# Altium PCB History-of-my-proto.pcbdoc
Units mil, origin at the board's own origin, x right, y up, seen from the top; angles counter-clockwise.
Board outline 14211.29 x 6437.81 mil, 2 copper layers (Top Layer, Bottom Layer); 75 components, 36 nets, 555 pads, 63 vias.
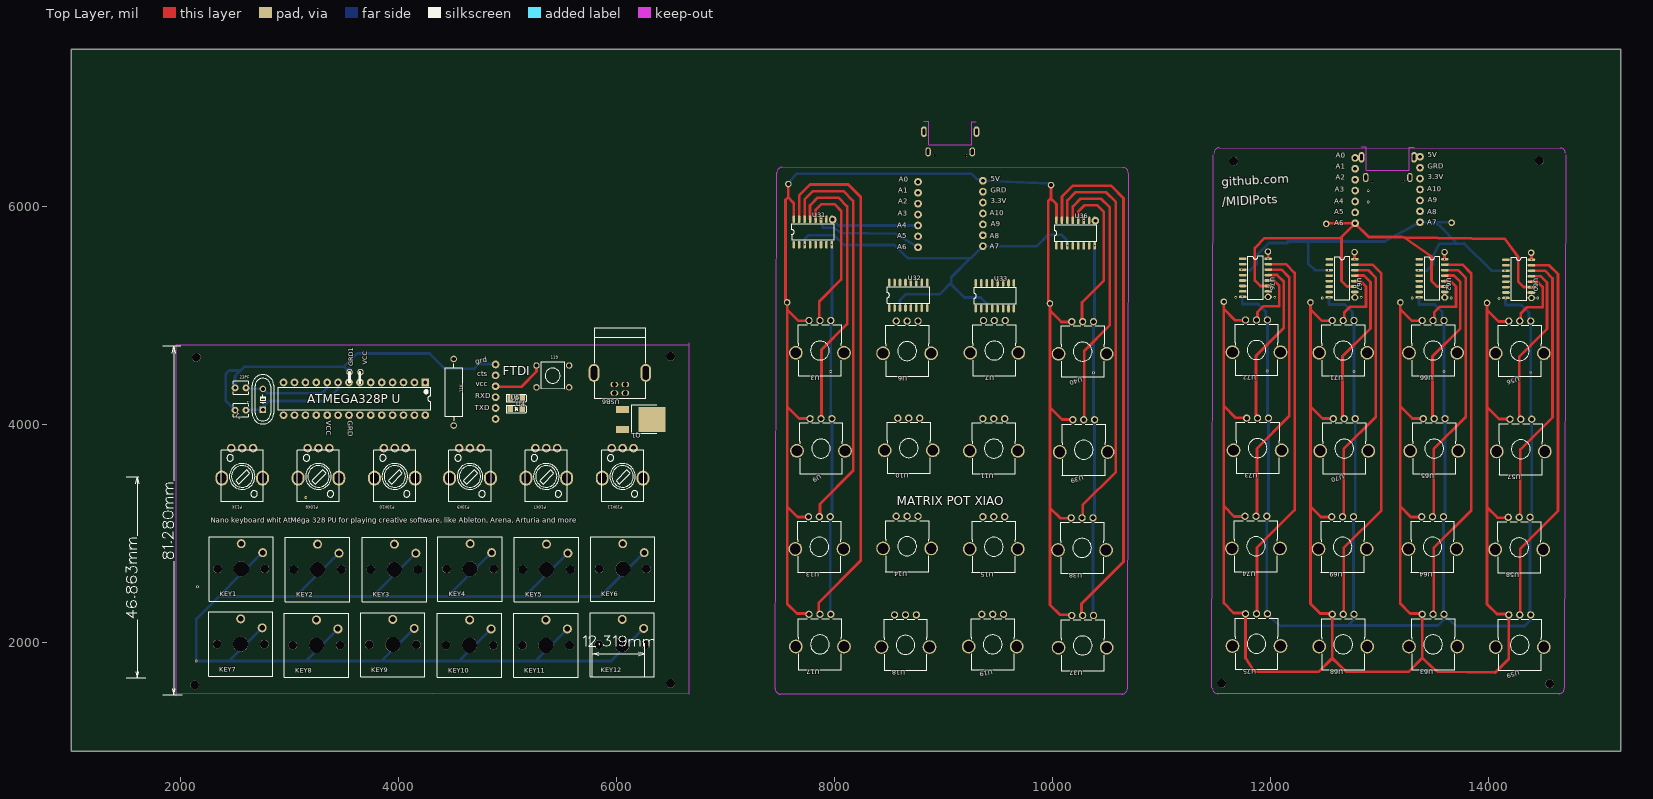
[diagram p0: Top Layer view]
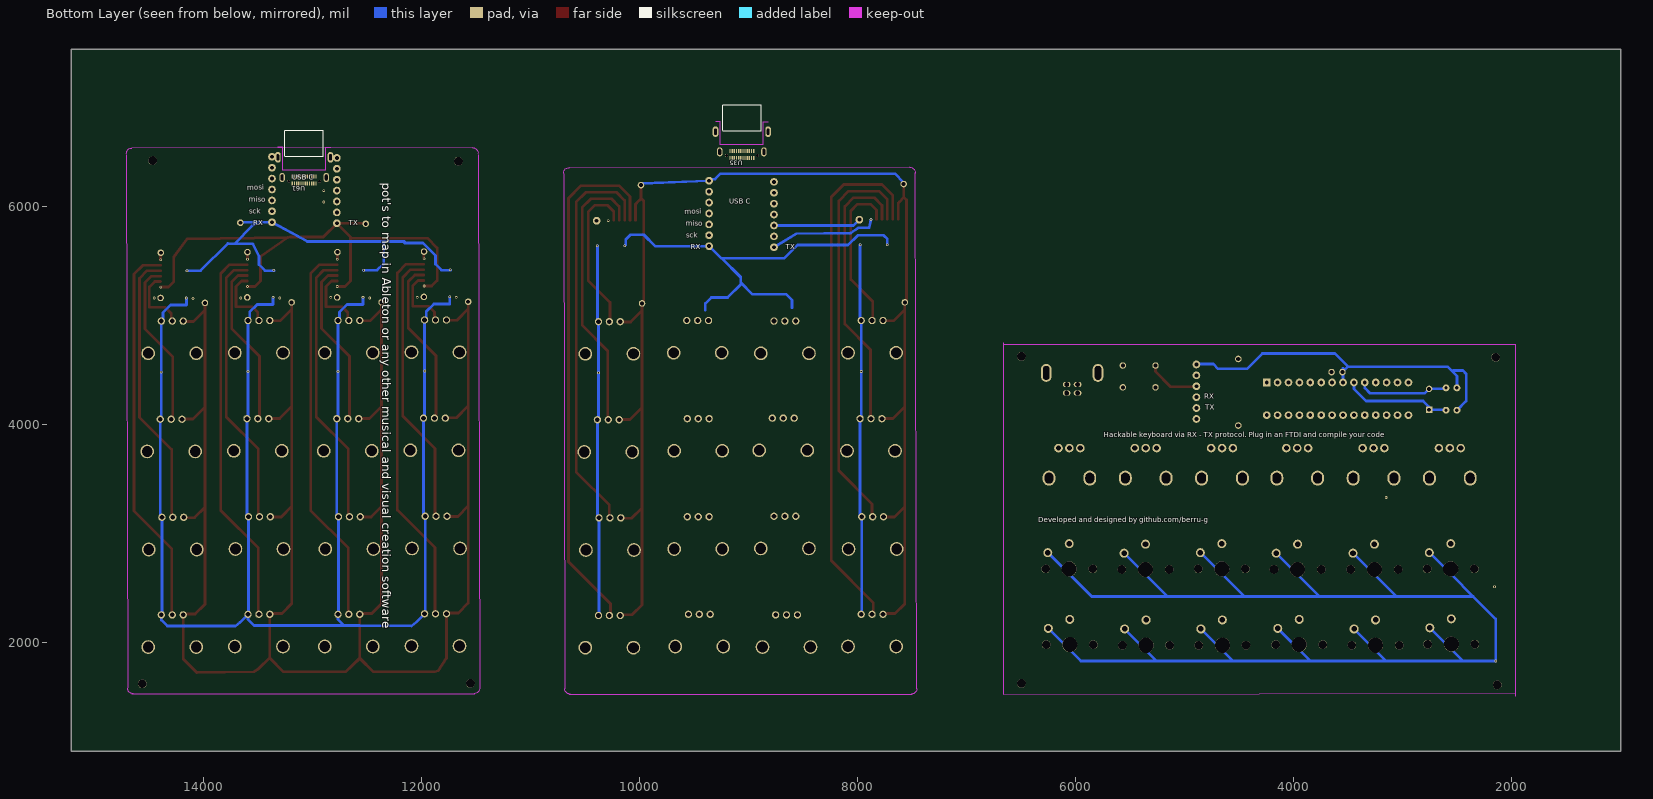
[diagram p1: Bottom Layer view, seen from below]

## Layer stack, top to bottom
Top Layer: signal copper (thickness not stored)
Dielectric: dielectric 12.6, FR-4, Dk 4.8
Bottom Layer: signal copper (thickness not stored)

## Board outline
15211.29,1000 1000,1000 1000,7437.81 15211.29,7437.81

## Components (designator, comment, footprint, x,y, rotation, side; value= is the part's Value field where it differs from the comment)
11K "RES-TH_BD4.0-L11.5-P15.50-D0.7" RES-TH_BD4.0-L11.5-P15.50-D0.7 4506.29,4292.81 r270 top
23PF "CAP-TH_L3.5-W3.0-P2.54-D0.8" CAP-TH_L3.5-W3.0-P2.54-D0.8 2551.29,4332.81 r0 top
119 "SWITCH MINI BUTON PULSER" "SWITCH MINI BUTON PULSER" 5426.29,4427.81 r0 top
"\"1" "CAP-TH_L3.5-W3.0-P2.54-D0.8" CAP-TH_L3.5-W3.0-P2.54-D0.8 2551.29,4127.81 r180 top
.1 "HC-49US_L11.5-W4.5-P4.88" HC-49US_L11.5-W4.5-P4.88 2756.29,4227.81 r90 top
GRD1 "ATMEGA_328PU" ATMEGA_328PU 2946.29,4082.82 r0 top
KEY1 "KEY-TH_CPG135001D0X" KEY-TH_CPG135001D0X 2656.29,2862.82 r0 top
KEY2 "KEY-TH_CPG135001D0X" KEY-TH_CPG135001D0X 3356.29,2857.82 r0 top
KEY3 "KEY-TH_CPG135001D0X" KEY-TH_CPG135001D0X 4061.29,2857.82 r0 top
KEY4 "KEY-TH_CPG135001D0X" KEY-TH_CPG135001D0X 4756.29,2862.82 r0 top
KEY5 "KEY-TH_CPG135001D0X" KEY-TH_CPG135001D0X 5456.29,2857.82 r0 top
KEY6 "KEY-TH_CPG135001D0X" KEY-TH_CPG135001D0X 6156.29,2862.82 r0 top
KEY7 "KEY-TH_CPG135001D0X" KEY-TH_CPG135001D0X 2651.29,2172.82 r0 top
KEY8 "KEY-TH_CPG135001D0X" KEY-TH_CPG135001D0X 3346.29,2162.82 r0 top
KEY9 "KEY-TH_CPG135001D0X" KEY-TH_CPG135001D0X 4046.29,2167.82 r0 top
KEY10 "KEY-TH_CPG135001D0X" KEY-TH_CPG135001D0X 4751.29,2162.82 r0 top
KEY11 "KEY-TH_CPG135001D0X" KEY-TH_CPG135001D0X 5451.29,2162.82 r0 top
KEY12 "KEY-TH_CPG135001D0X" KEY-TH_CPG135001D0X 6151.29,2167.82 r0 top
P10K7 "R09-5KΩ" R09-5KΩ 5356.29,3642.82 r180 top
P10K8 "R09-5KΩ" R09-5KΩ 3266.29,3642.82 r180 top
P10K9 "R09-5KΩ" R09-5KΩ 4656.29,3642.82 r180 top
P10K10 "R09-5KΩ" R09-5KΩ 3966.29,3642.82 r180 top
P10K11 "R09-5KΩ" R09-5KΩ 6056.29,3642.82 r180 top
P11K "R09-5KΩ" R09-5KΩ 2566.29,3642.82 r180 top
Q1 "TO-252-2_L6.6-W6.1-P4.57-LS9.9-BR-CW" TO-252-2_L6.6-W6.1-P4.57-LS9.9-BR-CW 6191.29,4042.82 r180 top
U3 "RES-ADJ-TH_POT-R09V-100K" RES-ADJ-TH_POT-R09V-100K 7866.29,4802.81 r180 top
U4 "LED-3014-FD" LED-3014-FD 5081.29,4137.81 r0 top
U5 "LED-3014-FD" LED-3014-FD 5081.29,4237.81 r0 top
U6 "RES-ADJ-TH_POT-R09V-100K" RES-ADJ-TH_POT-R09V-100K 8666.29,4797.81 r180 top
U7 "RES-ADJ-TH_POT-R09V-100K" RES-ADJ-TH_POT-R09V-100K 9466.29,4802.81 r180 top
U9 "RES-ADJ-TH_POT-R09V-100K" RES-ADJ-TH_POT-R09V-100K 7876.29,3902.82 r180 top
U10 "RES-ADJ-TH_POT-R09V-100K" RES-ADJ-TH_POT-R09V-100K 8681.29,3907.82 r180 top
U11 "RES-ADJ-TH_POT-R09V-100K" RES-ADJ-TH_POT-R09V-100K 9461.29,3902.82 r180 top
U13 "RES-ADJ-TH_POT-R09V-100K" RES-ADJ-TH_POT-R09V-100K 7861.29,3002.82 r180 top
U14 "RES-ADJ-TH_POT-R09V-100K" RES-ADJ-TH_POT-R09V-100K 8666.29,3007.82 r180 top
U15 "RES-ADJ-TH_POT-R09V-100K" RES-ADJ-TH_POT-R09V-100K 9461.29,3002.82 r180 top
U17 "RES-ADJ-TH_POT-R09V-100K" RES-ADJ-TH_POT-R09V-100K 7866.29,2107.82 r180 top
U18 "RES-ADJ-TH_POT-R09V-100K" RES-ADJ-TH_POT-R09V-100K 8651.29,2102.82 r180 top
U19 "RES-ADJ-TH_POT-R09V-100K" RES-ADJ-TH_POT-R09V-100K 9451.29,2107.82 r180 top
U31 "SOIC-16_L9.9-W3.9-P1.27-LS6.0-BL-1" SOIC-16_L9.9-W3.9-P1.27-LS6.0-BL-1 7801.29,5762.81 r0 top
U32 "SOIC-16_L9.9-W3.9-P1.27-LS6.0-BL-1" SOIC-16_L9.9-W3.9-P1.27-LS6.0-BL-1 8676.29,5182.81 r0 top
U33 "SOIC-16_L9.9-W3.9-P1.27-LS6.0-BL-1" SOIC-16_L9.9-W3.9-P1.27-LS6.0-BL-1 9471.29,5177.81 r0 top
U35 "USB-C-SMD_GT-USB-7068B-A" USB-C-SMD_GT-USB-7068B-A 9061.29,6562.81 r180 bottom
U36 "SOIC-16_L9.9-W3.9-P1.27-LS6.0-BL-1" SOIC-16_L9.9-W3.9-P1.27-LS6.0-BL-1 10211.29,5752.81 r0 top
U37 "RES-ADJ-TH_POT-R09V-100K" RES-ADJ-TH_POT-R09V-100K 10276.29,2097.82 r180 top
U38 "RES-ADJ-TH_POT-R09V-100K" RES-ADJ-TH_POT-R09V-100K 10271.29,2992.82 r180 top
U39 "RES-ADJ-TH_POT-R09V-100K" RES-ADJ-TH_POT-R09V-100K 10286.29,3892.82 r180 top
U40 "RES-ADJ-TH_POT-R09V-100K" RES-ADJ-TH_POT-R09V-100K 10276.29,4792.81 r180 top
U56 "RES-ADJ-TH_POT-R09V-100K" RES-ADJ-TH_POT-R09V-100K 14286.29,4797.81 r180 top
U57 "RES-ADJ-TH_POT-R09V-100K" RES-ADJ-TH_POT-R09V-100K 14296.29,3897.82 r180 top
U58 "RES-ADJ-TH_POT-R09V-100K" RES-ADJ-TH_POT-R09V-100K 14281.29,2997.82 r180 top
U59 "RES-ADJ-TH_POT-R09V-100K" RES-ADJ-TH_POT-R09V-100K 14286.29,2102.82 r180 top
U60 "SOIC-16_L9.9-W3.9-P1.27-LS6.0-BL-1" SOIC-16_L9.9-W3.9-P1.27-LS6.0-BL-1 14276.29,5332.81 r270 top
U61 "USB-C-SMD_GT-USB-7068B-A" USB-C-SMD_GT-USB-7068B-A 13076.29,6327.81 r180 bottom
U62 "SOIC-16_L9.9-W3.9-P1.27-LS6.0-BL-1" SOIC-16_L9.9-W3.9-P1.27-LS6.0-BL-1 13481.29,5337.81 r270 top
U63 "RES-ADJ-TH_POT-R09V-100K" RES-ADJ-TH_POT-R09V-100K 13491.29,2107.82 r180 top
U64 "RES-ADJ-TH_POT-R09V-100K" RES-ADJ-TH_POT-R09V-100K 13486.29,3002.82 r180 top
U65 "RES-ADJ-TH_POT-R09V-100K" RES-ADJ-TH_POT-R09V-100K 13501.29,3902.82 r180 top
U66 "RES-ADJ-TH_POT-R09V-100K" RES-ADJ-TH_POT-R09V-100K 13491.29,4802.81 r180 top
U67 "SOIC-16_L9.9-W3.9-P1.27-LS6.0-BL-1" SOIC-16_L9.9-W3.9-P1.27-LS6.0-BL-1 12656.29,5337.81 r270 top
U68 "RES-ADJ-TH_POT-R09V-100K" RES-ADJ-TH_POT-R09V-100K 12666.29,2107.82 r180 top
U69 "RES-ADJ-TH_POT-R09V-100K" RES-ADJ-TH_POT-R09V-100K 12661.29,3002.82 r180 top
U70 "RES-ADJ-TH_POT-R09V-100K" RES-ADJ-TH_POT-R09V-100K 12676.29,3902.82 r180 top
U71 "RES-ADJ-TH_POT-R09V-100K" RES-ADJ-TH_POT-R09V-100K 12666.29,4802.81 r180 top
U72 "RES-ADJ-TH_POT-R09V-100K" RES-ADJ-TH_POT-R09V-100K 11871.29,4807.81 r180 top
U73 "RES-ADJ-TH_POT-R09V-100K" RES-ADJ-TH_POT-R09V-100K 11881.29,3907.82 r180 top
U74 "RES-ADJ-TH_POT-R09V-100K" RES-ADJ-TH_POT-R09V-100K 11866.29,3007.82 r180 top
U75 "RES-ADJ-TH_POT-R09V-100K" RES-ADJ-TH_POT-R09V-100K 11871.29,2112.82 r180 top
U76 "SOIC-16_L9.9-W3.9-P1.27-LS6.0-BL-1" SOIC-16_L9.9-W3.9-P1.27-LS6.0-BL-1 11861.29,5342.81 r270 top
USB6 "USB-B-TH_FUS213-FDBXXK" USB-B-TH_FUS213-FDBXXK 6031.29,4377.81 r180 top
? "" ? 1926.99,3112.82 r0 top
? "" ? 1591.64,2590.32 r0 top
? "" ? 6018.79,1867.77 r0 top
? "" ? 5416.29,4167.81 r0 top
? "" ? 5740.81,4438.33 r0 top

## Footprints (in the part's own frame and the unit in brackets; to place one, negate y for a bottom-side part, rotate by r counter-clockwise, add the part's x,y. Pads: shape width x height; smd on the part's side, far side on the other; paste and mask are expansions set on the pad)
ATMEGA_328PU [mm]
  rect 1.8x1.8 hole 0.9: 1(33.02,7.62)
  round 1.8 hole 0.9: 2(30.48,7.62) 3(27.94,7.62) 4(25.4,7.62) 5(22.86,7.62) 6(20.32,7.62) 7(17.78,7.62) 8(15.24,7.62) 9(12.7,7.62) 10(10.16,7.62) 11(7.62,7.62) 12(5.08,7.62) 13(2.54,7.62) 14(0,7.62) 15(0,0) 16(2.54,0) 17(5.08,0) 18(7.62,0) 19(10.16,0) 20(12.7,0) 21(15.24,0) 22(17.78,0) 23(20.32,0) 24(22.86,0) 25(25.4,0) 26(27.94,0) 27(30.48,0) 28(33.02,0)
  silkscreen extent -1.19,1.16 34.21,6.46
CAP-TH_L3.5-W3.0-P2.54-D0.8 [mm]
  round 1.6 hole 0.8: 1(-1.27,0) 2(1.27,0)
  silkscreen extent -1.75,-1.5 1.75,1.5
HC-49US_L11.5-W4.5-P4.88 [mm]
  rect 1.5x1.5 hole 0.9: 1(-2.438,0)
  round 1.5 hole 0.9: 2(2.438,0)
  silkscreen extent -5.74,-2.5 5.74,2.5
KEY-TH_CPG135001D0X [mm]
  round 2.1 hole 1.3: 1(-2.5,1.05) 2(2.5,-1.05)
  round 2 hole 2 unplated: ""(-8,-4.85) ""(3,-4.85)
  round 3.5 hole 3.5 unplated: ""(-2.5,-4.85)
  silkscreen extent -10,-12.35 5,2.65
LED-3014-FD [mm]
  rect 1.3x1.4 smd: 1(-1.4,0) 2(1.4,0)
  silkscreen extent -2.26,-0.96 2.34,0.94
R09-5KΩ [mm]
  round 2 hole 1.2: 1(-2.54,-3.5) 2(0,-3.5) 3(2.54,-3.5)
  oval 3x3.5 hole 2 slot 2.5 at 90 deg: 4(4.75,3.5) 5(-4.75,3.5)
  silkscreen extent -4.9,-3 4.9,9
RES-ADJ-TH_POT-R09V-100K [mm]
  round 1.7 hole 1.1: 1(-2.54,-3.75) 2(0,-3.75) 3(2.54,-3.75)
  round 3.2 hole 2.5: 4(5.6,3.75) 5(-5.6,3.75)
  silkscreen extent -5,-2.75 5,9.25
RES-TH_BD4.0-L11.5-P15.50-D0.7 [mil]
  round 60 hole 39.37: 1(-305.12,0) 2(305.11,0)
  silkscreen extent -260,-79 260,79
SOIC-16_L9.9-W3.9-P1.27-LS6.0-BL-1 [mm]
  oval 0.6x1.8 smd: 1(-4.445,-2.972) 2(-3.175,-2.972) 3(-1.905,-2.972) 4(-0.635,-2.972) 5(0.635,-2.972) 6(1.905,-2.972) 7(3.175,-2.972) 8(4.445,-2.972) 9(4.445,2.972) 10(3.175,2.972) 11(1.905,2.972) 12(0.635,2.972) 13(-0.635,2.972) 14(-1.905,2.972) 15(-3.175,2.972) 16(-4.445,2.972)
  silkscreen extent -4.98,-1.85 4.98,1.83
"SWITCH MINI BUTON PULSER" [mil]
TO-252-2_L6.6-W6.1-P4.57-LS9.9-BR-CW [mm]
  rect 3x1.6 smd: 1(3.424,-2.29) 3(3.424,2.29)
  rect 6.2x5.8 smd: 2(-3.424,0)
  silkscreen extent -4.58,-3.35 1.38,3.35
USB-B-TH_FUS213-FDBXXK [mm]
  oval 1.8x1.2 hole 1: 1(1.27,2.355) 2(-1.27,2.355) 3(-1.27,0.355) 4(1.27,0.355)
  oval 2.5x4.2 hole 1.5 slot 3.2 at 90 deg: 5(-6.025,-2.355) 5(6.025,-2.355)
  silkscreen extent -6,-12.75 6,3.55
USB-C-SMD_GT-USB-7068B-A [mm]
  oval 1.3x2.5 hole 0.6 slot 1.4 at 90 deg: 25(-6.13,3.05) 25(6.13,3.05)
  oval 1.3x2.1 hole 0.6 slot 1.4 at 90 deg: 25(-5.15,-1.65) 25(5.15,-1.65)
  rect 0.3x0.95 smd: A1(2.75,-3.05) A2(2.25,-3.05) A3(1.75,-3.05) A4(1.25,-3.05) A5(0.75,-3.05) A6(0.25,-3.05) A7(-0.25,-3.05) A8(-0.75,-3.05) A9(-1.25,-3.05) A10(-1.75,-3.05) A11(-2.25,-3.05) A12(-2.75,-3.05) B1(-2.75,-1.45) B2(-2.25,-1.45) B3(-1.75,-1.45) B4(-1.25,-1.45) B5(-0.75,-1.45) B6(-0.25,-1.45) B7(0.25,-1.45) B8(0.75,-1.45) B9(1.25,-1.45) B10(1.75,-1.45) B11(2.25,-1.45) B12(2.75,-1.45)
  round 0.65 hole 0.65 unplated: ""(-3.6,-2.5) ""(3.6,-2.5)
  Keep-Out Layer lines w0.254: 6.15,5.35 5,5.35 5,0 -5,0 -5,5.35 -6.12,5.35
  silkscreen extent -4.47,3.25 4.47,9.25
? [mil]
  silkscreen extent -89,-1600 89,1600

## Free pads (board coordinates)
  round 60 hole 36: 2(3651.29,4477.81) 3(3551.29,4477.81) 29(7576.29,6202.81) 29(9986.29,6192.81) 29(11976.29,5582.81) 29(12771.29,5577.81) 29(13596.29,5577.81) 29(14391.29,5572.81) 30(7566.29,5117.81) 30(9976.29,5107.81) 30(11571.29,5122.81) 30(12366.29,5117.81) 30(13191.29,5117.81) 30(13986.29,5112.81) 32(11978.29,5167.81) 32(12773.29,5162.81) 32(13598.29,5162.81) 32(14393.29,5157.81) 33(12511.29,5837.81) 34(13661.29,5847.81)
  round 70.87 hole 35.43: 3V(9361.29,6032.81) 3V(13371.29,6252.81) 5V(9361.29,6232.81) 5V(13371.29,6452.81) 23(4891.29,4047.82) 23(8766.29,5622.81) 23(8766.29,5722.81) 23(12776.29,5842.81) 23(12776.29,5942.81) 24(4891.29,4147.81) 24(8766.29,5822.81) 24(12776.29,6042.81) 25(4891.29,4247.81) 26(4891.29,4347.81) 27(4891.29,4447.81) 28(4891.29,4547.81) 31(7983.07,5876.03) 31(10393.07,5866.03) A0(8766.29,6222.81) A0(12776.29,6442.81) A1(8766.29,6122.81) A1(12776.29,6342.81) A2(8766.29,6022.81) A2(12776.29,6242.81) A3(8766.29,5922.81) A3(12776.29,6142.81) A7(9361.29,5632.81) A7(13371.29,5852.81) A8(9361.29,5732.81) A8(13371.29,5952.81) A9(9361.29,5832.81) A9(13371.29,6052.81) A10(9361.29,5932.81) A10(13371.29,6152.81) GRD(9361.29,6132.81) GRD(13371.29,6352.81)
  round 59.05 hole 35.98: A1(5266.29,4337.81) A2(5566.29,4337.81) B1(5266.29,4537.81) B2(5566.29,4537.81)
  round 80 hole 80 unplated: ""(2131.29,1607.82) ""(2146.29,4612.81) ""(6496.29,1622.82) ""(6496.29,4622.81) ""(11551.29,1622.82) ""(11661.29,6412.81) ""(14466.29,6417.81) ""(14561.29,1617.82)

## Via types
v1: diameter 24, hole 12, Top Layer to Bottom Layer, tented both sides, 63 vias

## Nets (pads, with @x,y where several pads share a name; then routed paths per layer and width w, separated by ;. In a path a pad name is that pad's centre, name@x,y a point inside that pad or via, vN(x,y) a via of type N, cw(c..) or ccw(c..) an arc to the next point about the centre after c; other vN are vias at no path point)
3.3V: pad.3V
5V: 11K.1 11K.2 23PF.1 23PF.2 "\"1.1" "\"1.2" .1.1 .1.2 GRD1.1 GRD1.3 GRD1.7 GRD1.8 GRD1.9 GRD1.10 GRD1.15 GRD1.21 GRD1.22 GRD1.26 KEY1.2 KEY2.2 KEY3.2 KEY4.2 KEY5.2 KEY6.2 KEY7.2 KEY8.2 KEY9.2 KEY10.2 KEY11.2 KEY12.2 P10K7.1 P10K7.3 P10K8.1 P10K8.3 P10K9.1 P10K9.3 P10K10.1 P10K10.3 P10K11.1 P10K11.3 P11K.1 P11K.3 pad.2 pad.3 pad.5V pad.23@4891.29,4047.82 pad.26 pad.28 pad.29 pad.30 pad.B1 U3.3 U9.3 U13.3 U17.3 U31.16 U36.16 U37.3 U38.3 U39.3 U40.3 U56.3 U57.3 U58.3 U59.3 U60.16 U62.16 U63.3 U64.3 U65.3 U66.3 U67.16 U68.3 U69.3 U70.3 U71.3 U72.3 U73.3 U74.3 U75.3 U76.16 USB6.1 USB6.4 | length 61117.3
  Top Layer w25: pad.26 4896.29,4342.81 5126.29,4342.81 5266.29,4482.81 pad.B1 ; 7566.29,4181.7 7566.29,3242.82 ; U31.16 7626.29,6027.81 7616.29,6037.81 7576.29,6077.81 v1(7576.29,6202.81) 7576.29,6082.81 7551.29,6057.81 7551.29,5132.81 pad.30@7566.29,5117.81 ; U13.3 7758.65,3147.82 7661.29,3147.82 7566.29,3242.82 ; U17.3 7758.93,2262.82 7656.29,2262.82 7566.29,2352.82 7566.29,3242.82 ; U3.3 7763.65,4947.81 7671.29,4947.81 7566.29,5052.81 pad.30@7566.29,5117.81 ; U9.3 7773.93,4052.82 7676.29,4052.82 7566.29,4162.81 pad.30@7566.29,5117.81 ; 8766.29,6022.81 8771.29,6017.81 ; 9361.29,6032.81 9366.29,6027.81 ; 9976.29,4171.7 9976.29,3232.82 ; U36.16 10036.29,6017.81 10026.29,6027.81 9986.29,6067.81 v1(9986.29,6192.81) 9986.29,6072.81 9961.29,6047.81 9961.29,5122.81 pad.30@9976.29,5107.81 ; U38.3 10168.65,3137.82 10071.29,3137.82 9976.29,3232.82 ; U37.3 10168.93,2252.82 10066.29,2252.82 9976.29,2342.82 9976.29,3232.82 ; U40.3 10173.65,4937.81 10081.29,4937.81 9976.29,5042.81 pad.30@9976.29,5107.81 ; U39.3 10183.93,4042.82 10086.29,4042.82 9976.29,4152.81 pad.30@9976.29,5107.81 ; 11571.29,4186.7 11571.29,3247.82 ; U74.3 11763.65,3152.82 11666.29,3152.82 11571.29,3247.82 ; 11771.29,1852.82 11846.29,1737.82 11881.29,1727.82 12441.29,1727.82 12566.29,1852.82 ; 11771.29,1857.82 U75.3 11763.93,2267.82 11661.29,2267.82 11571.29,2357.82 11571.29,3247.82 ; U72.3 11768.65,4952.81 11676.29,4952.81 11571.29,5057.81 11571.29,5122.81 11571.29,4167.81 11681.29,4057.82 11778.93,4057.82 U73.3 ; v1(11976.29,5582.81) 11978.29,5580.81 U76.16 ; 12366.29,4181.7 12366.29,3242.82 ; U69.3 12558.65,3147.82 12461.29,3147.82 12366.29,3242.82 ; U71.3 12563.65,4947.81 12471.29,4947.81 12366.29,5052.81 12366.29,5117.81 12366.29,4162.81 12476.29,4052.82 12573.93,4052.82 U70.3 ; v1(12771.29,5512.81) pad.29@12771.29,5577.81 ; 12776.29,6242.81 12781.29,6237.81 ; 13191.29,4181.7 13191.29,3242.82 ; 13371.29,6252.81 13376.29,6247.81 ; U64.3 13383.65,3147.82 13286.29,3147.82 13191.29,3242.82 ; 13391.29,1861.45 13501.29,1751.45 13536.29,1727.82 14061.29,1722.82 14186.29,1847.82 U59.3 14178.93,2257.82 14076.29,2257.82 13986.29,2347.82 13986.29,3237.82 ; U63.3@13391.29,2255.41 13391.29,1852.82 13266.29,1727.82 12696.29,1727.82 12566.29,1852.82 ; U63.3 13383.93,2262.82 13281.29,2262.82 13191.29,2352.82 13191.29,3242.82 ; U66.3 13388.65,4947.81 13296.29,4947.81 13191.29,5052.81 13191.29,5117.81 13191.29,4162.81 13301.29,4052.82 13398.93,4052.82 U65.3 ; v1(13596.29,5512.81) pad.29@13596.29,5577.81 ; 13986.29,4176.7 13986.29,3237.82 ; U58.3 14178.65,3142.82 14081.29,3142.82 13986.29,3237.82 ; U56.3 14183.65,4942.81 14091.29,4942.81 13986.29,5047.81 13986.29,5112.81 13986.29,4157.81 14096.29,4047.82 14193.93,4047.82 U57.3 ; v1(14391.29,5572.81) 14393.29,5570.81 U60.16 ; 12366.29,3242.82 12366.29,2352.82 12456.29,2262.82 12558.93,2262.82 U68.3 12566.29,1852.82
  Bottom Layer w24: GRD1.8 3546.29,4512.81 ; pad.3@3546.29,4457.81 3551.29,4462.81 v1(3551.29,4477.81)
  Bottom Layer w25: 2351.41,2418.18 3056.41,2418.18 ; 2501.28,4127.81 2416.29,4212.81 2416.29,4462.81 2446.29,4492.81 2536.57,4492.81 ; 23PF.1 2501.28,4442.81 2586.29,4527.81 3501.29,4527.81 ; 2601.28,4127.81 2605.28,4131.81 .1.1 2756.28,4157.81 2811.29,4212.81 3336.29,4212.81 3446.29,4322.81 GRD1.9 ; 23PF.2 2610.28,4323.82 .1.2 2797.28,4282.81 3296.29,4282.81 3346.29,4332.81 GRD1.10 ; KEY7.2 2446.05,1827.82 v1(2146.29,1827.82) ; KEY1.2 2146.29,2213.06 v1(2146.29,1827.82) ; KEY8.2 3151.05,1827.82 v1(2146.29,1827.82) ; KEY2.2 3056.41,2418.18 ; v1(3551.29,4477.81) 3501.29,4527.81 ; 3749.7,2418.18 4451.41,2418.18 ; KEY9.2 3846.05,1827.82 v1(2146.29,1827.82) ; KEY3.2 3761.41,2418.18 3056.41,2418.18 ; KEY10.2 4556.05,1827.82 v1(2146.29,1827.82) ; KEY4.2 4451.41,2418.18 ; pad.28 4886.29,4552.81 4736.29,4552.81 4691.29,4507.81 4426.29,4507.81 4286.29,4647.81 3621.29,4647.81 3501.29,4527.81 ; 5139.7,2418.18 5851.41,2418.18 KEY6.2 ; KEY11.2 5256.05,1827.82 v1(2146.29,1827.82) ; KEY5.2 5156.41,2418.18 4451.41,2418.18 ; KEY12.2 5951.05,1827.82 v1(2146.29,1827.82) ; pad.29@7576.29,6217.81 7656.29,6297.81 9256.29,6297.81 9306.29,6247.81 pad.5V@9361.29,6247.81 ; v1(9361.29,6232.81) pad.29@9986.29,6207.81
  other v1: 2156.29,2507.82 3151.29,3327.82 3651.29,4477.81 14391.29,5507.81 11976.29,5517.81 13371.29,6452.81
A: pad.32
A0: pad.A0
A1: pad.A1@8766.29,6122.81 pad.A1@12776.29,6342.81
A2: pad.A2@8766.29,6022.81 pad.A2@12776.29,6242.81
A3: pad.A3
  other v1: 14451.29,5157.81 12831.29,5162.81 8766.29,5922.81 12896.29,6142.81
A4: pad.24@8766.29,5822.81 pad.24@12776.29,6042.81 pad.31 | length 838.6
  Bottom Layer w25: pad.31@7971.29,5887.81 7983.07,5876.03 8036.29,5822.81 v1(8766.29,5822.81) ; pad.31@10381.29,5877.81 pad.31@10393.07,5866.03
  other v1: 13659.29,5157.81 12039.29,5162.81 12896.29,6037.81
A5: pad.23@8766.29,5722.81 pad.23@12776.29,5942.81 U31.10 U36.10 U60.10 U62.10 U67.10 U76.10
AREF: GRD1.20
GRD: 
  other v1: 14156.29,5157.81 12536.29,5162.81 13361.29,5162.81 11741.29,5167.81
MISO: pad.A9
  other v1: 9361.29,5832.81 13371.29,6052.81
MOSI: pad.A10
  other v1: 9361.29,5932.81 13371.29,6152.81
RX: pad.25 pad.34 pad.A7 | length 8136.2
  Bottom Layer w25: v1(7726.29,5645.81) 7726.29,5697.81 7761.29,5732.81 7996.29,5732.81 8086.29,5642.81 8551.29,5642.81 8671.29,5522.81 9251.29,5522.81 ; 8601.29,5067.81 8601.29,5137.81 8656.29,5192.81 8966.29,5192.81 9071.29,5297.81 ; 9396.29,5048.03 9396.29,5107.81 9341.29,5162.81 9191.29,5162.81 9071.29,5282.81 9071.29,5297.81 ; v1(10136.29,5635.81) 10126.29,5645.81 10126.29,5692.81 10081.29,5737.81 9961.29,5737.81 9856.29,5632.81 v1(9361.29,5632.81) 9251.29,5522.81 ; v1@11731.29,5412.81 11816.29,5412.81 11871.29,5467.81 11871.29,5547.81 11986.29,5662.81 12156.29,5662.81 ; 12156.29,5676.34 13049.81,5676.34 v1(13371.29,5852.81) ; 12346.29,5676.34 12346.29,5467.81 12406.29,5412.81 v1(12531.29,5412.81) ; v1@13351.29,5407.81 13436.29,5407.81 13491.29,5462.81 13491.29,5542.81 13546.29,5652.81 13776.29,5657.81 14026.29,5407.81 v1(14151.29,5407.81) ; pad.34 13656.29,5852.81 v1(13371.29,5852.81) ; 13710.18,5657.81 13556.29,5817.81 13491.29,5852.81 v1(13371.29,5852.81) ; 9071.29,5297.81 9071.29,5347.81 9246.29,5522.81 9251.29,5522.81
  other v1: 4891.29,4247.81 4146.29,4382.81 13356.29,5412.81 11736.29,5417.81
S$1229: GRD1.4 GRD1.5 KEY1.1 KEY7.1 KEY8.1 pad.A2@5566.29,4337.81
S$1965: GRD1.6 KEY9.1
S$1968: GRD1.11
S$1970: GRD1.12
S$2162: GRD1.28
S$2168: GRD1.2 GRD1.25
S$2170: GRD1.23 GRD1.24 P10K7.2 P10K8.2 P10K9.2 P10K10.2 P10K11.2 P11K.2
S$2203: GRD1.13
S$2205: GRD1.14
S$2361: GRD1.16
S$2363: GRD1.17
S$2365: GRD1.18
S$27766: 
S$27770: 
S$122089: U3.2 U31.12 U36.12 U40.2 U56.2 U60.12 U62.12 U66.2 U67.12 U71.2 U72.2 U76.12 | length 5347.8
  Top Layer w25: U31.12 7826.29,5962.81 7881.29,6017.81 8001.29,6017.81 8061.29,5957.81 8061.29,5327.81 7861.29,5127.81 7861.29,4955.45 U3.2 ; U36.12 10236.29,5952.81 10291.29,6007.81 10411.29,6007.81 10471.29,5947.81 10471.29,5317.81 10271.29,5117.81 10271.29,4945.45 U40.2 ; U72.2 11881.29,4965.45 11881.29,5027.81 11936.29,5082.81 12081.29,5082.81 12081.29,5267.81 12031.29,5317.81 U76.12 ; U71.2 12676.29,4960.45 12676.29,5022.81 12731.29,5077.81 12876.29,5077.81 12876.29,5262.81 12826.29,5312.81 U67.12 ; U66.2 13501.29,4960.45 13501.29,5022.81 13556.29,5077.81 13701.29,5077.81 13701.29,5262.81 13651.29,5312.81 U62.12 ; U56.2 14296.29,4955.45 14296.29,5017.81 14351.29,5072.81 14496.29,5072.81 14496.29,5257.81 14446.29,5307.81 U60.12
S$122093: U9.2 U31.13 U36.13 U39.2 U57.2 U60.13 U62.13 U65.2 U67.13 U70.2 U73.2 U76.13 | length 11282
  Top Layer w25: U31.13 7776.29,6007.81 7846.29,6077.81 8036.29,6077.81 8116.29,5997.81 8116.29,4917.81 7881.29,4682.81 7881.29,4055.45 U9.2 ; U36.13 10186.29,5997.81 10256.29,6067.81 10446.29,6067.81 10526.29,5987.81 10526.29,4907.81 10291.29,4672.81 10291.29,4045.45 U39.2 ; U73.2 11866.29,4070.45 11866.29,4627.81 12121.29,4882.81 12121.29,5307.81 12061.29,5367.81 U76.13 ; U70.2 12661.29,4065.45 12661.29,4622.81 12916.29,4877.81 12916.29,5302.81 12856.29,5362.81 U67.13 ; U65.2 13486.29,4065.45 13486.29,4622.81 13741.29,4877.81 13741.29,5302.81 13681.29,5362.81 U62.13 ; U57.2 14281.29,4060.45 14281.29,4617.81 14536.29,4872.81 14536.29,5297.81 14476.29,5357.81 U60.13
S$122097: U13.2 U31.14 U36.14 U38.2 U58.2 U60.14 U62.14 U64.2 U67.14 U69.2 U74.2 U76.14 | length 17607
  Top Layer w25: U31.14 7726.29,6062.81 7801.29,6137.81 8081.29,6137.81 8171.29,6047.81 8171.29,3572.82 7866.29,3267.82 7866.29,3155.45 U13.2 ; U36.14 10136.29,6052.81 10211.29,6127.81 10491.29,6127.81 10581.29,6037.81 10581.29,3562.82 10276.29,3257.82 10276.29,3145.45 U38.2 ; U74.2 11876.29,3165.45 11876.29,3777.82 12171.29,4072.82 12171.29,5347.81 12101.29,5417.81 U76.14 ; U69.2 12671.29,3160.45 12671.29,3772.82 12966.29,4067.82 12966.29,5342.81 12896.29,5412.81 U67.14 ; U64.2 13496.29,3160.45 13496.29,3772.82 13791.29,4067.82 13791.29,5342.81 13721.29,5412.81 U62.14 ; U58.2 14291.29,3155.45 14291.29,3767.82 14586.29,4062.82 14586.29,5337.81 14516.29,5407.81 U60.14
S$122104: U17.2 U31.15 U36.15 U37.2 U59.2 U60.15 U62.15 U63.2 U67.15 U68.2 U75.2 U76.15 | length 23919.9
  Top Layer w25: U31.15 7676.29,6097.81 7776.29,6197.81 8126.29,6197.81 8241.29,6082.81 8241.29,2747.82 7856.29,2362.82 7856.29,2265.45 U17.2 ; U36.15 10086.29,6087.81 10186.29,6187.81 10536.29,6187.81 10651.29,6072.81 10651.29,2737.82 10266.29,2352.82 10266.29,2255.45 U37.2 ; U75.2 11876.29,2265.45 11876.29,2867.82 12221.29,3212.82 12221.29,5387.81 12141.29,5467.81 U76.15 ; U68.2 12671.29,2260.45 12671.29,2862.82 13016.29,3207.82 13016.29,5382.81 12936.29,5462.81 U67.15 ; U63.2 13496.29,2260.45 13496.29,2862.82 13841.29,3207.82 13841.29,5382.81 13761.29,5462.81 U62.15 ; U59.2 14291.29,2255.45 14291.29,2857.82 14636.29,3202.82 14636.29,5377.81 14556.29,5457.81 U60.15
S$131267: GRD1.27 pad.27 pad.GRD U3.1 U9.1 U13.1 U17.1 U37.1 U38.1 U39.1 U40.1 U56.1 U57.1 U58.1 U59.1 U63.1 U64.1 U65.1 U66.1 U68.1 U69.1 U70.1 U71.1 U72.1 U73.1 U74.1 U75.1 | length 22127.5
  Bottom Layer w25: U17.1 7961.29,2260.45 U13.1 7976.29,3165.45 U9.1 7966.29,4060.45 v1(7966.29,4482.81) U3.1 7976.29,4960.45 v1(7976.29,5645.81) ; U37.1 10371.29,2250.45 U38.1 10386.29,3155.45 U39.1 10376.29,4050.45 v1(10376.29,4472.81) U40.1 10386.29,4950.45 v1(10386.29,5635.81) ; 11741.29,5167.81 11741.29,5102.81 11886.29,5102.81 11956.29,5032.81 11956.29,4970.45 U72.1 v1(11971.29,4487.81) 11971.29,4065.45 U73.1 11981.29,3170.45 U74.1 11966.29,2265.45 U75.1 12046.29,2185.45 12091.29,2147.82 12711.29,2152.82 12766.29,2207.82 U68.1 12761.29,2260.45 U69.1 12776.29,3165.45 U70.1 12766.29,4060.45 v1(12766.29,4482.81) U71.1 12751.29,4965.45 12751.29,5027.81 12681.29,5097.81 12536.29,5097.81 12536.29,5162.81 ; 12566.29,2152.82 13536.29,2152.82 13591.29,2207.82 U63.1 ; 13361.29,5162.81 13361.29,5097.81 13506.29,5097.81 13576.29,5027.81 13576.29,4965.45 U66.1 v1(13591.29,4482.81) 13591.29,4060.45 U65.1 13601.29,3165.45 U64.1 13586.29,2260.45 U63.1 ; 14156.29,5157.81 14156.29,5092.81 14301.29,5092.81 14371.29,5022.81 14371.29,4960.45 U56.1 v1(14386.29,4477.81) 14386.29,4055.45 U57.1 14396.29,3160.45 U58.1 14381.29,2255.45 U59.1 14386.29,2202.82 14331.29,2147.82 13706.29,2147.82 13666.29,2180.45 U63.1
  other v1: 14096.29,5152.81 12476.29,5157.81 13301.29,5157.81 11681.29,5162.81 9361.29,6132.81 13371.29,6352.81
SCK: pad.A8
TX: pad.23@8766.29,5622.81 pad.23@12776.29,5842.81 pad.24@4891.29,4147.81 pad.33 U31.9 U31.11 U36.9 U36.11 U60.9 U60.11 U62.9 U62.11 U67.9 U67.11 U76.9 U76.11 | length 6064.6
  Top Layer w25: U76.11 11906.29,5267.81 11856.29,5317.81 11856.29,5617.81 11944.81,5706.34 12651.29,5706.34 ; pad.33 12516.29,5842.81 pad.23@12776.29,5842.81 ; U67.11 12701.29,5262.81 12651.29,5312.81 12651.29,5537.81 12651.29,5717.81 pad.23@12776.29,5842.81 ; 13046.29,5717.81 12901.29,5717.81 ; 13206.29,5717.81 12901.29,5717.81 ; U62.11 13526.29,5262.81 13476.29,5312.81 13476.29,5537.81 13226.29,5712.81 14151.29,5697.81 14271.29,5532.81 14271.29,5307.81 14321.29,5257.81 U60.11 ; pad.23@12776.29,5842.81 12901.29,5717.81
  Bottom Layer w25: v1(7876.29,5877.81) 7891.29,5802.81 7991.29,5802.81 8061.29,5753.61 8561.29,5747.81 pad.23@8766.29,5622.81
  other v1: 4891.29,4147.81 4046.29,4382.81 14391.29,5257.81 12771.29,5262.81 13596.29,5262.81 11976.29,5267.81 10286.29,5867.81
VCC: GRD1.19
pads on no net: KEY1. KEY2. KEY2.1 KEY3. KEY3.1 KEY4. KEY4.1 KEY5. KEY5.1 KEY6. KEY6.1 KEY7. KEY8. KEY9. KEY10. KEY10.1 KEY11. KEY11.1 KEY12. KEY12.1 P10K7.4 P10K7.5 P10K8.4 P10K8.5 P10K9.4 P10K9.5 P10K10.4 P10K10.5 P10K11.4 P10K11.5 P11K.4 P11K.5 Q1.1 Q1.2 Q1.3 U3.4 U3.5 U4.1 U4.2 U5.1 U5.2 U6.1 U6.2 U6.3 U6.4 U6.5 U7.1 U7.2 U7.3 U7.4 U7.5 U9.4 U9.5 U10.1 U10.2 U10.3 U10.4 U10.5 U11.1 U11.2 U11.3 U11.4 U11.5 U13.4 U13.5 U14.1 U14.2 U14.3 U14.4 U14.5 U15.1 U15.2 U15.3 U15.4 U15.5 U17.4 U17.5 U18.1 U18.2 U18.3 U18.4 U18.5 U19.1 U19.2 U19.3 U19.4 U19.5 U31.1 U31.2 U31.3 U31.4 U31.5 U31.6 U31.7 U31.8 U32.1 U32.2 U32.3 U32.4 U32.5 U32.6 U32.7 U32.8 U32.9 U32.10 U32.11 U32.12 U32.13 U32.14 U32.15 U32.16 U33.1 U33.2 U33.3 U33.4 U33.5 U33.6 U33.7 U33.8 U33.9 U33.10 U33.11 U33.12 U33.13 U33.14 U33.15 U33.16 U35. U35.25 U35.A1 U35.A2 U35.A3 U35.A4 U35.A5 U35.A6 U35.A7 U35.A8 U35.A9 U35.A10 U35.A11 U35.A12 U35.B1 U35.B2 U35.B3 U35.B4 U35.B5 U35.B6 U35.B7 U35.B8 U35.B9 U35.B10 U35.B11 U35.B12 U36.1 U36.2 U36.3 U36.4 U36.5 U36.6 U36.7 U36.8 U37.4 U37.5 U38.4 U38.5 U39.4 U39.5 U40.4 U40.5 U56.4 U56.5 U57.4 U57.5 U58.4 U58.5 U59.4 U59.5 U60.1 U60.2 U60.3 U60.4 U60.5 U60.6 U60.7 U60.8 U61. U61.25 U61.A1 U61.A2 U61.A3 U61.A4 U61.A5 U61.A6 U61.A7 U61.A8 U61.A9 U61.A10 U61.A11 U61.A12 U61.B1 U61.B2 U61.B3 U61.B4 U61.B5 U61.B6 U61.B7 U61.B8 U61.B9 U61.B10 U61.B11 U61.B12 U62.1 U62.2 U62.3 U62.4 U62.5 U62.6 U62.7 U62.8 U63.4 U63.5 U64.4 U64.5 U65.4 U65.5 U66.4 U66.5 U67.1 U67.2 U67.3 U67.4 U67.5 U67.6 U67.7 U67.8 U68.4 U68.5 U69.4 U69.5 U70.4 U70.5 U71.4 U71.5 U72.4 U72.5 U73.4 U73.5 U74.4 U74.5 U75.4 U75.5 U76.1 U76.2 U76.3 U76.4 U76.5 U76.6 U76.7 U76.8 USB6.2 USB6.3 USB6.5

## Keep-outs
Keep-Out Layer:
  lines w10: 7456.29,1572.82 ccw(c7506.29,1572.82) 7506.29,1522.82 ; 7471.59,6302.29 cw(c7521.29,6307.81) 7521.29,6357.81 ; 10636.29,1522.82 ccw(c10636.29,1572.82) 10686.29,1572.82 ; 10646.29,6353.44 cw(c10646.29,6303.44) 10696.29,6303.44 ; 11466.29,1577.82 ccw(c11516.29,1577.82) 11516.29,1527.82 ; 11481.59,6482.29 cw(c11531.29,6487.81) 11531.29,6537.81 ; 14646.29,1527.82 ccw(c14646.29,1577.82) 14696.29,1577.82 ; 14656.29,6533.44 cw(c14656.29,6483.44) 14706.29,6483.44

## Silkscreen, mask and mechanical layers (free items; w line width, h text height)
Top Overlay:
  circle w10: c5414.29,4445.81 r69
  lines w10: 5304.29,4565.81 5524.29,4565.81 ; 5306.29,4563.81 5306.29,4327.81 5524.29,4325.81 ; 5524.29,4327.81 5524.29,4563.81
  lines w24 net S$27766: 3646.29,4377.81 3646.29,4477.81
  lines w24 net S$27770: 3551.29,4382.81 3551.29,4477.81
  text "5V" at 13444.59,6430.11 h80
  text "A0" at 12599.59,6425.11 h80 r359
  text "A1" at 12596.29,6322.81 h80
  text "GRD" at 13441.29,6322.81 h80 r1
  text "3.3V" at 13441.29,6227.81 h80
  text "A2" at 12596.29,6222.81 h80 r1
  text "5V" at 9434.59,6210.11 h80
  text "A0" at 8589.59,6205.11 h80 r359
  text "github.com" at 11553.38,6182.87 h80 r3
  text "A10" at 13436.29,6117.81 h80 r359
  text "A3" at 12591.29,6112.81 h80 r359
  text "A1" at 8586.29,6102.81 h80
  text "GRD" at 9431.29,6102.81 h80 r1
  text "A9" at 13441.29,6017.81 h80 r359
  text "3.3V" at 9431.29,6007.81 h80
  text "A2" at 8586.29,6002.81 h80 r1
  text "A4" at 12586.29,6002.81 h80
  text "/MIDIPots" at 11558.38,5997.87 h80 r3
  text "A5" at 12586.29,5907.81 h80
  text "A8" at 13436.29,5907.81 h80 r359
  text "A10" at 9426.29,5897.81 h80 r359
  text "A3" at 8581.29,5892.81 h80 r359
  text "A7" at 13436.29,5812.81 h80
  text "A6" at 12586.29,5807.81 h80 r359
  text "A9" at 9431.29,5797.81 h80 r359
  text "A4" at 8576.29,5782.81 h80
  text "A5" at 8576.29,5687.81 h80
  text "A8" at 9426.29,5687.81 h80 r359
  text "A7" at 9426.29,5592.81 h80
  text "A6" at 8576.29,5587.81 h80 r359
  text "VCC" at 3713.79,4542.81 h45 r90
  text "grd" at 4714.59,4530.11 h80 r12
  text "FTDI" at 4956.29,4447.81 h80
  text "cts" at 4721.29,4422.81 h80
  text "vcc" at 4711.29,4327.81 h80
  text "RXD" at 4706.29,4217.81 h80
  text "TXD" at 4701.29,4107.81 h80
  text "VCC" at 3321.29,4032.82 h80 r270
  text "GRD" at 3516.29,4032.82 h80 r271
  text "MATRIX POT XIAO" at 8571.29,3257.82 h80
  text "Nano keyboard whit AtMéga 328 PU for playing creative software, like Ableton, Arena, Arturia and more" at 2276.29,3077.82 h80
Bottom Overlay:
  text "USB C" at 13186.29,6222.81 h80
  text "pot's to map in Ableton or any other musical and visual creation software" at 12361.29,6212.81 h80 r90
  text "mosi" at 13596.29,6127.81 h80 r358
  text "miso" at 13586.29,6022.81 h80 r1
  text "USB C" at 9176.29,6002.81 h80
  text "sck" at 13581.29,5912.81 h80 r359
  text "mosi" at 9586.29,5907.81 h80 r358
  text "TX" at 12666.29,5807.81 h80
  text "RX" at 13541.29,5807.81 h80
  text "miso" at 9576.29,5802.81 h80 r1
  text "sck" at 9571.29,5692.81 h80 r359
  text "TX" at 8656.29,5587.81 h80
  text "RX" at 9531.29,5587.81 h80
  text "RX" at 4821.29,4212.81 h80
  text "TX" at 4811.29,4112.81 h80
  text "Hackable keyboard via RX - TX protocol. Plug in an FTDI and compile your code" at 5741.29,3862.82 h80
  text "Developed and designed by github.com/berru-g" at 6341.29,3082.82 h80

## Text inside footprints (layer, text, board x,y; h text height)
GRD1: Top Overlay "ATMEGA328P U" at 3162.22,4191.56 h80